# Altium PCB H-BRIDGE.PcbDoc
Units mm, origin at the board's own origin, x right, y up, seen from the top; angles counter-clockwise.
Board outline 57.02 x 50.93 mm, 2 copper layers (Top Layer, Bottom Layer); 16 components, 20 nets, 54 pads, 12 vias.
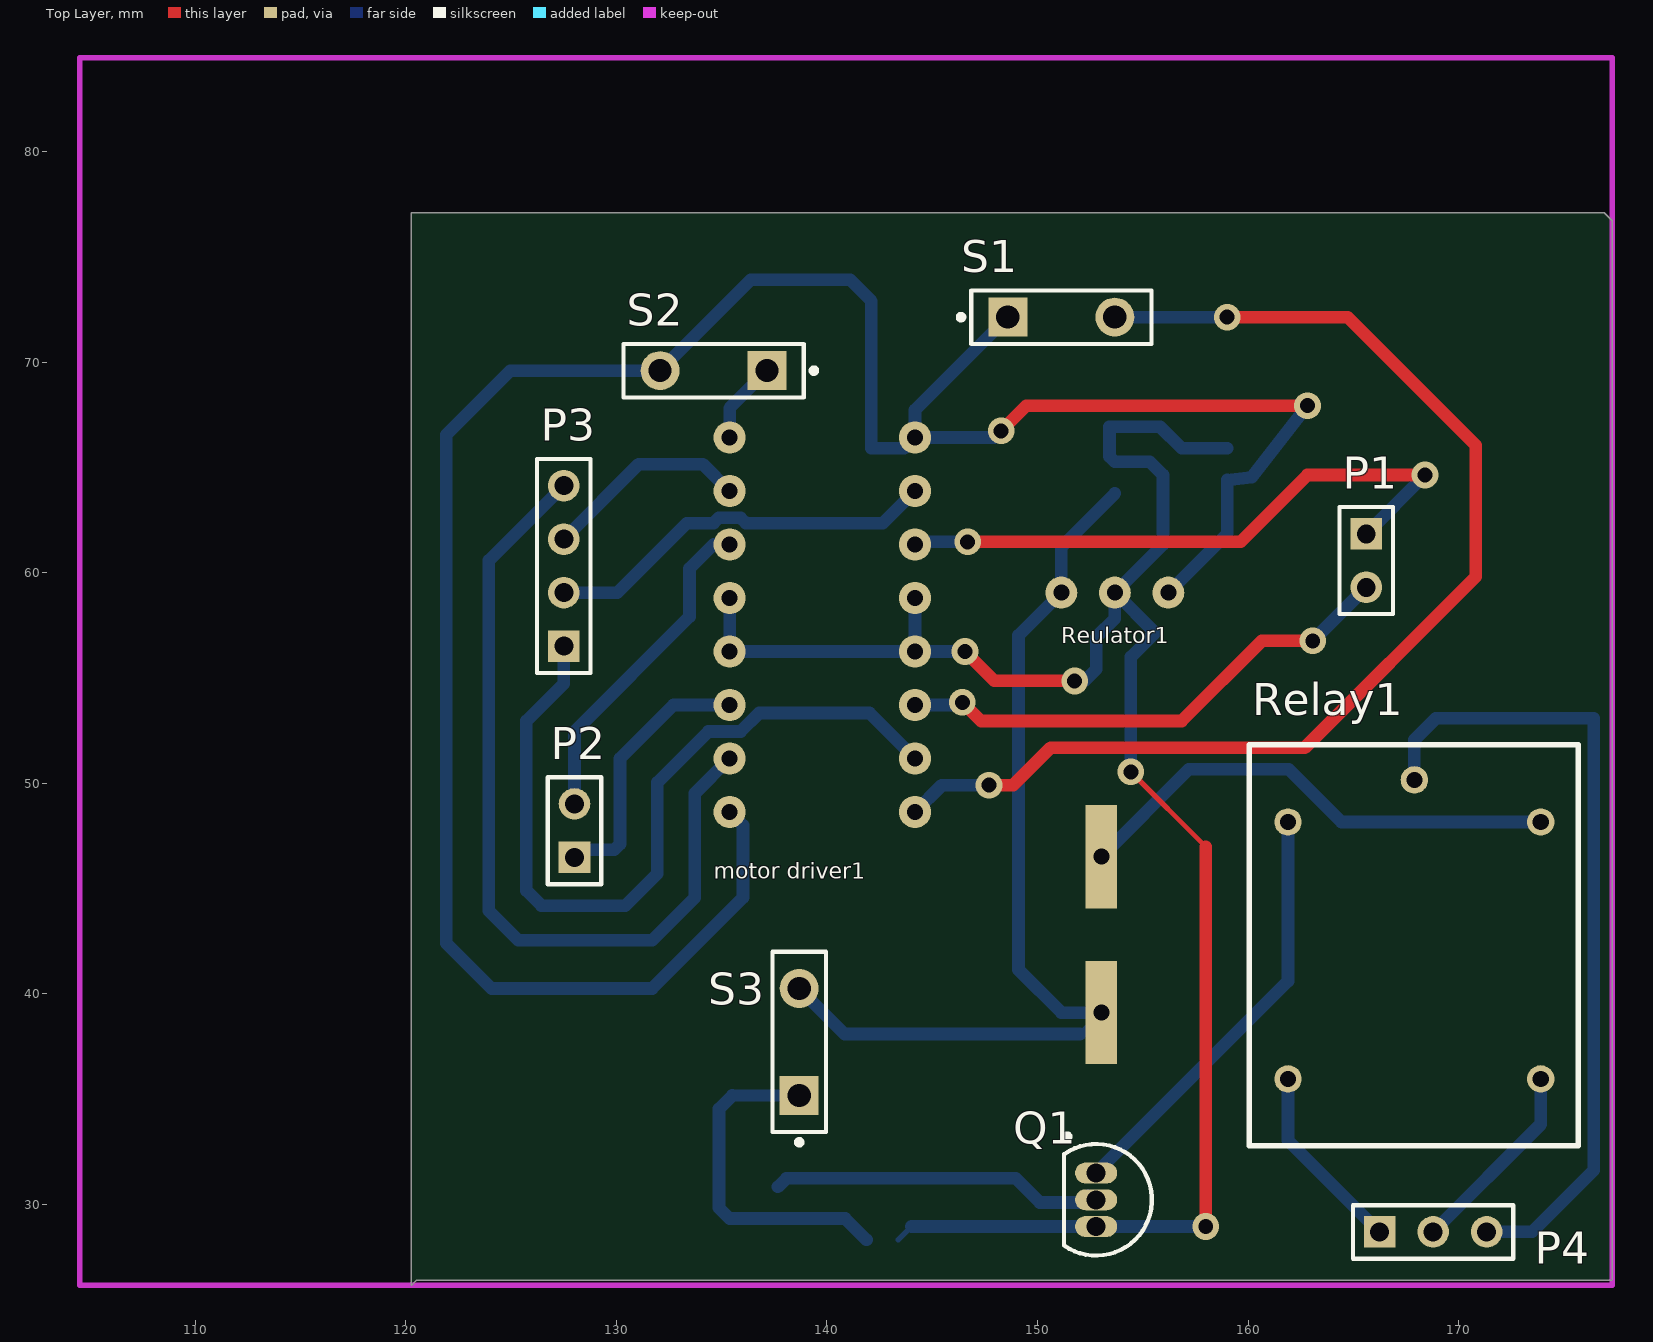
[diagram p0: Top Layer view]
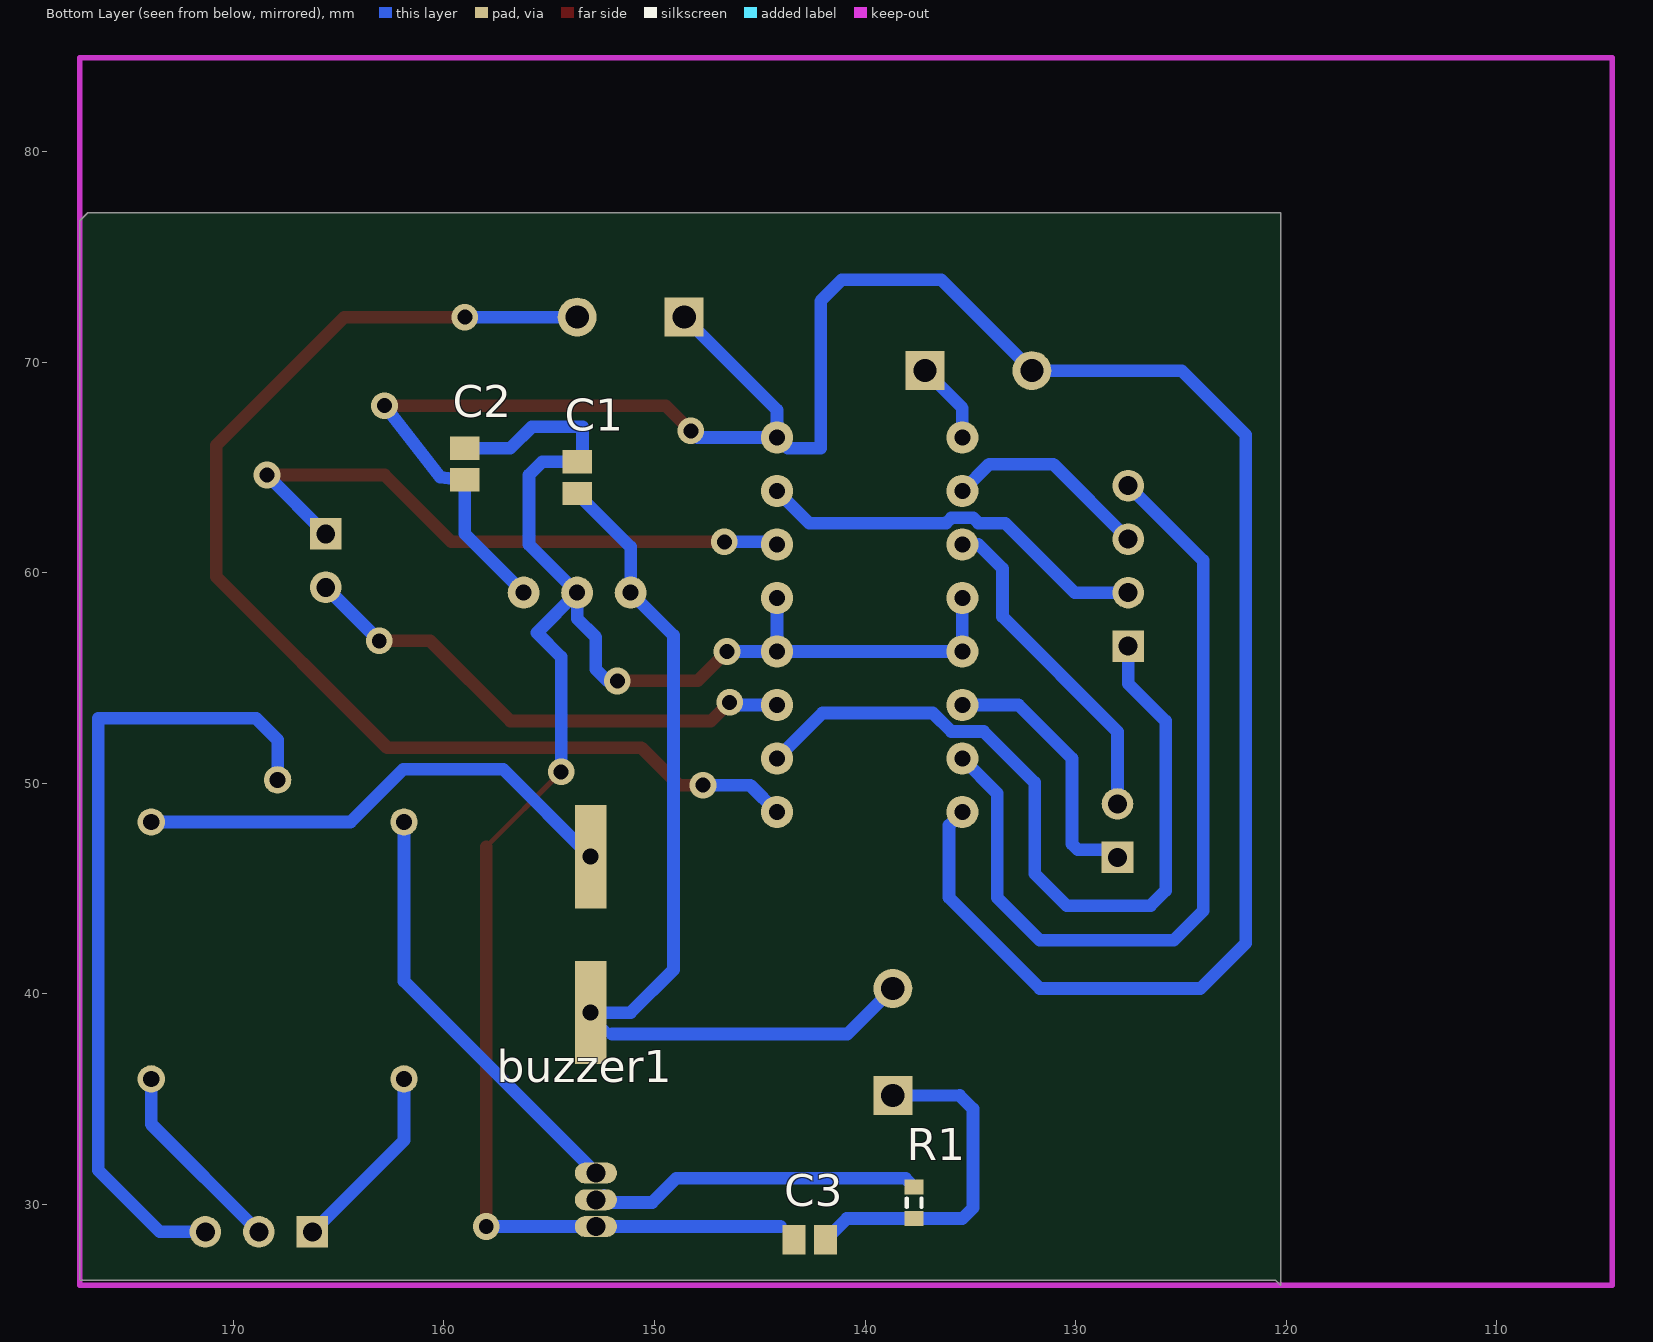
[diagram p1: Bottom Layer view, seen from below]

## Layer stack, top to bottom
Top Solder: solder mask 0.0102, Solder Resist, Dk 3.5
Top Layer: signal copper 0.0356
Dielectric 1: dielectric 0.32, FR-4, Dk 4.8
Bottom Layer: signal copper 0.0356
Bottom Solder: solder mask 0.0102, Solder Resist, Dk 3.5

## Board outline
177.292,76.708 176.911,77.089 120.269,77.089 120.269,26.162 120.523,26.416 177.292,26.416

## Design rules (kind name [scope] priority, off if disabled: settings)
Clearance [All] p1: gap=0.2 ignorepadtopadclearanceinfootprint=TRUE
PolygonConnect [All] p1: connectstyle=Relief reliefconductorwidth=0.254 reliefentries=4 polygonreliefangle="90 Angle" airgapwidth=0.254
RoutingVias [All] p1: holewidth=0.711 width=1.27 viastyle="Through Hole" minholewidth=0.711 minwidth=1.27 maxholewidth=0.711 maxwidth=1.27
SolderMaskExpansion [All] p1: expansion=0.102
Width [All] p1: maxlimit=4 minlimit=0.2 preferedwidth=0.8
30 further rules are at their usual default settings.

## Components (designator, comment, footprint, x,y, rotation, side; value= is the part's Value field where it differs from the comment)
buzzer1 "buzzer" Buzzer 153.035,46.516 r0 bottom
C1 "Cap Pol3" C0805 153.67,64.516 r90 bottom value=10UF
C2 "Cap Pol3" C0805 159.004,65.163 r90 bottom value=0.1UF
C3 "Cap Pol3" C0805 142.633,28.321 r0 bottom value=1000UF
"motor driver1" "L293D" L293D 144.182,66.421 r180 top
P1 "motor 1" HDR1X2 165.608,61.849 r270 top
P2 "motor 2" HDR1X2 128.016,46.482 r90 top
P3 "raspberry inputs" HDR1X4 127.508,56.515 r90 top
P4 "Header 3" HDR1X3 166.243,28.702 r0 top (schematic designator P?)
Q1 "NPN" TO-226-AA 152.781,30.226 r180 top
R1 "Res3" J1-0603 137.668,30.087 r90 bottom value=10k
Relay1 "Realy 5v" "Relay 5v" 170.084,42.315 r90 top
Reulator1 "7805" "7805 REGULATOR" 151.13,59.055 r0 top
S1 "SW-PB" SPST-2 151.13,72.136 r0 top
S2 "SW-PB" SPST-2 134.62,69.596 r180 top
S3 "push start on button" SPST-2 138.684,37.719 r90 top

## Footprints (in the part's own frame and the unit in brackets; to place one, negate y for a bottom-side part, rotate by r counter-clockwise, add the part's x,y. Pads: shape width x height; smd on the part's side, far side on the other; paste and mask are expansions set on the pad)
"7805 REGULATOR" [mil]
  round 60 hole 30: 1(0,0) 2(200,0) 3(100,0)
  body extent -100,-110 300,70, height 895
Buzzer [mm]
  rect 1.5x4.9 hole 0.762: +(0,7.4) -(0,0)
  body extent -4.56,-2.47 5.59,9.83, height 4
C0805 [mm] "Chip Capacitor, Body 2.0x1.3mm, IPC High Density"
  rect 1.1x1.4 smd: 1(-0.75,0) 2(0.75,0)
  body extent -1.1,-0.72 1.1,0.72, height 1.4
HDR1X2 [mm] "Connector; Header; 2 Position"
  rect 1.5x1.5 hole 0.9: 1(0,0)
  round 1.5 hole 0.9: 2(2.54,0)
  silkscreen extent -1.27,-1.27 3.81,1.27
HDR1X3 [mm] "Connector; Header; 3 Position"
  rect 1.5x1.5 hole 0.9: 1(0,0)
  round 1.5 hole 0.9: 2(2.54,0) 3(5.08,0)
  silkscreen extent -1.27,-1.27 6.35,1.27
HDR1X4 [mm] "Connector; Header; 4 Position"
  rect 1.5x1.5 hole 0.9: 1(0,0)
  round 1.5 hole 0.9: 2(2.54,0) 3(5.08,0) 4(7.62,0)
  silkscreen extent -1.27,-1.27 8.89,1.27
J1-0603 [mm] "Chip Resistor, Body 1.6x0.8mm, IPC High Density"
  rect 0.7x0.9 smd: 1(-0.75,0) 2(0.75,0)
  silkscreen extent -0.2,-0.35 0.2,0.35, body extent -0.85,-0.48 0.85,0.48, height 0.9
L293D [mil]
  round 60 hole 30: Enable(0,700) "Enable 2"(346.46,0) GND(0,400) GND(0,300) GND(346.46,300) GND(346.46,400) "IN 1"(0,600) "IN 2"(0,100) "IN 3"(346.46,100) "IN 4"(346.46,600) "OUT 1"(0,500) "OUT 2"(0,200) "OUT 3"(346.46,200) "OUT 4"(346.46,500) Vs(0,0) Vss(346.46,700)
  body extent -10,-33 354,732, height 209
"Relay 5v" [mm]
  round 1.3 hole 0.762: 1(5.85,-3.81) 2(5.85,8.19) COM(7.85,2.19) NC(-6.35,-3.81) NO(-6.35,8.19)
  silkscreen extent -9.53,-5.59 9.53,10.03, body extent -9.45,-5.46 9.45,10.04, height 15.5
SPST-2 [mm] "Switch; 2 Leads"
  rect 1.85x1.85 hole 1.1: 1(-2.54,0)
  round 1.85 hole 1.1: 2(2.54,0)
  silkscreen extent -4.89,-1.27 4.28,1.27
TO-226-AA [mm] "TO, Flat Index; 3 In-Line, Axial Leads; Body Dia. 4.8mm; Leads 0.55 x 0.51 mm (max)"
  oval 2x1 hole 0.9: 1(0,-1.27) 2(0,0) 3(0,1.27)
  silkscreen extent -2.65,-3.13 1.52,2.65, body extent -2.65,-2.66 1.52,2.66, height 5.33

## Part data
buzzer1: "Magnetic NO 2700Hz 85dB @ 3V, 10cm 3V F9mm SMD Buzzers RoHS", chain Rule=https://lcsc.com/product-detail/Buzzers_FUET-FST-9045_C391040.html, Created By="mohamed abdelsalam", Data sheet=https://datasheet.lcsc.com/szlcsc/1912111437_FUET-FUET-9045_C391040.pdf
C1 C2 C3: "Polarized Capacitor (Surface Mount)", LatestRevisionDate=29-May-2009, LatestRevisionNote="IPC-7351 Footprint Added.", PackageDescription="Chip Capacitor", PackageReference=C0805, Published=8-Jun-2000, Publisher="Altium Limited"
"motor driver1": library part motor-L293D, "DIP-16 Motor Drivers RoHS", Data sheet=https://datasheet.lcsc.com/szlcsc/1811151537_STMicroelectronics-L293D_C12340.pdf, supply chain=https://lcsc.com/product-detail/Motor-Drivers_STMicroelectronics_L293D_L293D_C12340.html
P1 P2: library part "Header 2", "Header, 2-Pin", LatestRevisionDate=17-Jul-2002, LatestRevisionNote="Re-released for DXP Platform.", Publisher="Altium Limited"
P3: library part "Header 4", "Header, 4-Pin", LatestRevisionDate=17-Jul-2002, LatestRevisionNote="Re-released for DXP Platform.", Publisher="Altium Limited"
P4: "Header, 3-Pin", LatestRevisionDate=17-Jul-2002, LatestRevisionNote="Re-released for DXP Platform.", Publisher="Altium Limited"
Q1: "NPN Bipolar Transistor", Code_JEDEC=TO-226-AA, LatestRevisionDate=17-Jul-2002, LatestRevisionNote="Re-released for DXP Platform.", PackageDescription="TO, Flat Index; 3 In-Line, Axial Leads; Body Dia. 4.8mm; Leads 0.55 x 0.51 mm (max)", PackageReference=TO-226-AA, Published=8-Jun-2000, Publisher="Altium Limited"
R1: "Resistor", LatestRevisionDate=29-May-2009, LatestRevisionNote="IPC-7351 Footprint Added.", PackageDescription="Chip Resistor", PackageReference=J1-0603, Published=8-Jun-2000, Publisher="Altium Limited"
Relay1: "General Purpose Non Latching 24VDC SPDT Through Hole Relays RoHS", Created By="mohamed abdelsalam", Data=3-10-2020, Data sheet=https://datasheet.lcsc.com/szlcsc/1809211229_SANYOU-RELAYS-SRD-S-124D_C276435.pdf, supply chain=https://www.3dcontentcentral.com/secure/download-model.aspx?catalogid=171&id=871297
Reulator1: library part "7805 Regulator"
S1 S2: "Switch", LatestRevisionDate=17-Jul-2002, LatestRevisionNote="Re-released for DXP Platform.", PackageDescription="Switch; 2 Leads", PackageReference=SPST-2, Published=24-Mar-1999, Publisher="Altium Limited"
S3: library part SW-PB, "Switch", LatestRevisionDate=17-Jul-2002, LatestRevisionNote="Re-released for DXP Platform.", PackageDescription="Switch; 2 Leads", PackageReference=SPST-2, Published=24-Mar-1999, Publisher="Altium Limited"

## Via types
v1: diameter 1.27, hole 0.711, Top Layer to Bottom Layer, 12 vias

## Nets (pads, with @x,y where several pads share a name; then routed paths per layer and width w, separated by ;. In a path a pad name is that pad's centre, name@x,y a point inside that pad or via, vN(x,y) a via of type N, cw(c..) or ccw(c..) an arc to the next point about the centre after c; other vN are vias at no path point)
1: "motor driver1.IN 1" P3.1 | length 38.3
  Bottom Layer w0.6: P3.1 127.508,54.737 125.73,52.959 125.73,44.914 126.448,44.196 130.429,44.196 131.953,45.72 131.953,50.038 134.374,52.459 135.905,52.459 136.786,53.34 142.023,53.34 144.182,51.181
2: "motor driver1.IN 2" P3.2 | length 18.9
  Bottom Layer w0.6: P3.2 130.048,59.055 133.35,62.357 134.613,62.357 134.859,62.603 135.905,62.603 136.151,62.357 142.658,62.357 144.182,63.881
3: "motor driver1.IN 3" P3.3 | length 9.9
  Bottom Layer w0.6: P3.3 131.064,65.151 134.112,65.151 135.382,63.881
4: "motor driver1.IN 4" P3.4 | length 40.2
  Bottom Layer w0.6: P3.4 123.952,60.579 123.952,43.942 125.349,42.545 131.699,42.545 133.731,44.577 133.731,49.53 135.382,51.181
5V: "motor driver1.Vs" "motor driver1.Vss" C2.1 Reulator1.2 S1.1 S2.2 | length 117
  Top Layer w0.6: v1(148.273,66.739) 149.468,67.934 v1(162.814,67.934)
  Bottom Layer w0.254: 143.674,65.913 144.182,66.421 ; v1@147.955,66.421 v1(148.273,66.739)
  Bottom Layer w0.6: 135.382,48.641 136.017,48.006 136.017,44.577 131.699,40.259 124.079,40.259 121.92,42.418 121.92,66.548 124.968,69.596 S2.2 136.398,73.914 141.097,73.914 142.113,72.898 142.113,65.913 143.674,65.913 ; v1@147.955,66.421 144.182,66.421 144.182,67.728 S1.1 ; Reulator1.2 159.004,61.849 C2.1 ; C2.1@159.004,64.389 160.159,64.532 v1(162.814,67.934)
GND: "motor driver1.GND" C1.2 C2.2 C3.2 Q1.3 Reulator1.3 | length 92
  Top Layer w0.254: v1(154.432,50.546) 157.988,46.99
  Top Layer w0.6: v1(146.558,56.261) 147.955,54.864 v1(151.765,54.864) ; v1(157.988,28.956) 157.988,46.99
  Bottom Layer w0.254: C3.2 144.018,28.956 ; 144.182,58.801 144.309,58.928 ; v1(151.765,54.864) v1@152.233,54.864
  Bottom Layer w0.6: 135.382,58.801 135.382,56.261 144.182,56.261 ; 144.018,28.956 Q1.3 v1(157.988,28.956) ; 144.182,58.801 144.182,56.261 ; v1(146.558,56.261) 144.182,56.261 ; v1@152.233,54.864 152.781,55.412 152.781,56.936 153.67,57.825 Reulator1.3 ; v1(154.432,50.546) 154.432,56.007 155.575,57.15 Reulator1.3 ; C2.2 156.845,65.913 155.829,66.929 153.416,66.929 153.416,65.52 C1.2 155.333,65.266 155.956,64.643 155.956,61.341 Reulator1.3
Netbuzzer1_-: buzzer1.- Relay1.1 | length 23.6
  Bottom Layer w0.6: buzzer1.- 157.192,50.673 161.925,50.673 164.433,48.165 Relay1.1
NetC3_1: C3.1 R1.1 S3.1 | length 16.4
  Bottom Layer w0.56: 135.509,35.179 S3.1
  Bottom Layer w0.6: 135.509,35.179 134.874,34.544 134.874,29.845 135.382,29.337 R1.1 140.867,29.337 C3.1
"Netmotor driver1_Enable": "motor driver1.Enable" S1.2 | length 57.2
  Top Layer w0.6: v1(147.701,49.911) 148.844,49.911 150.622,51.689 162.687,51.689 170.815,59.817 170.815,66.04 164.719,72.136 v1(159.004,72.136)
  Bottom Layer w0.6: 144.182,48.641 145.452,49.911 v1(147.701,49.911) ; S1.2 v1(159.004,72.136)
"Netmotor driver1_Enable 2": "motor driver1.Enable 2" S2.1 | length 3.9
  Bottom Layer w0.6: 135.382,66.421 135.382,67.818 S2.1
"Netmotor driver1_OUT 1": "motor driver1.OUT 1" P1.2 | length 24
  Top Layer w0.6: v1(146.431,53.848) 147.32,52.959 156.845,52.959 160.655,56.769 v1(163.068,56.769)
  Bottom Layer w0.6: 144.182,53.721 v1@146.05,53.721 ; v1(163.068,56.769) P1.2
"Netmotor driver1_OUT 2": "motor driver1.OUT 2" P1.1 | length 29.5
  Top Layer w0.6: v1(146.685,61.468) 159.639,61.468 162.814,64.643 v1(168.402,64.643)
  Bottom Layer w0.254: 144.182,61.341 144.309,61.468
  Bottom Layer w0.6: 144.309,61.468 v1(146.685,61.468) ; P1.1 v1(168.402,64.643)
"Netmotor driver1_OUT 3": "motor driver1.OUT 3" P2.2 | length 15.8
  Bottom Layer w0.6: P2.2 128.016,52.451 133.477,57.912 133.477,60.198 134.62,61.341 135.382,61.341
"Netmotor driver1_OUT 4": "motor driver1.OUT 4" P2.1 | length 13
  Bottom Layer w0.254: P2.1 P2.1@128.385,46.851
  Bottom Layer w0.6: P2.1 P2.1@128.016,46.736 ; P2.1@128.385,46.851 129.909,46.851 130.175,47.117 130.175,51.181 132.715,53.721 135.382,53.721
NetP?_1: P4.1 Relay1.NO | length 9.1
  Bottom Layer w0.6: Relay1.NO 161.894,33.051 P4.1
NetP?_2: P4.2 Relay1.NC | length 9.4
  Bottom Layer w0.6: P4.2 173.894,33.813 Relay1.NC
NetP?_3: P4.3 Relay1.COM | length 38.6
  Bottom Layer w0.6: Relay1.COM 167.894,52.07 168.91,53.086 176.403,53.086 176.403,31.623 173.482,28.702 P4.3
NetQ1_1: Q1.1 Relay1.2 | length 20.4
  Bottom Layer w0.6: Q1.1 161.894,40.609 Relay1.2
NetQ1_2: Q1.2 R1.2 | length 16.4
  Bottom Layer w0.254: Q1.2@152.392,30.615 Q1.2
  Bottom Layer w0.6: R1.2 138.073,31.242 148.971,31.242 150.114,30.099 152.654,30.099 Q1.2
VCC: buzzer1.+ C1.1 Reulator1.1 S3.2 | length 45
  Bottom Layer w0.254: 152.019,38.1 buzzer1.+
  Bottom Layer w0.6: S3.2 140.843,38.1 152.019,38.1 ; buzzer1.+ 151.13,39.116 149.098,41.148 149.098,57.023 Reulator1.1 151.13,61.226 C1.1

## Keep-outs
Keep-Out Layer:
  lines w0.254: 104.521,26.162 177.292,26.162 177.292,84.455 104.521,84.455 104.521,26.162